# Altium PCB Motherboard.PcbDoc
Units mil, origin at the board's own origin, x right, y up, seen from the top; angles counter-clockwise.
Board outline 5022.5 x 5930 mil, 2 copper layers (Top Layer, Bottom Layer); 75 components, 54 nets, 323 pads, 10 vias.
Unrouted connection lines stored in the file: 58.
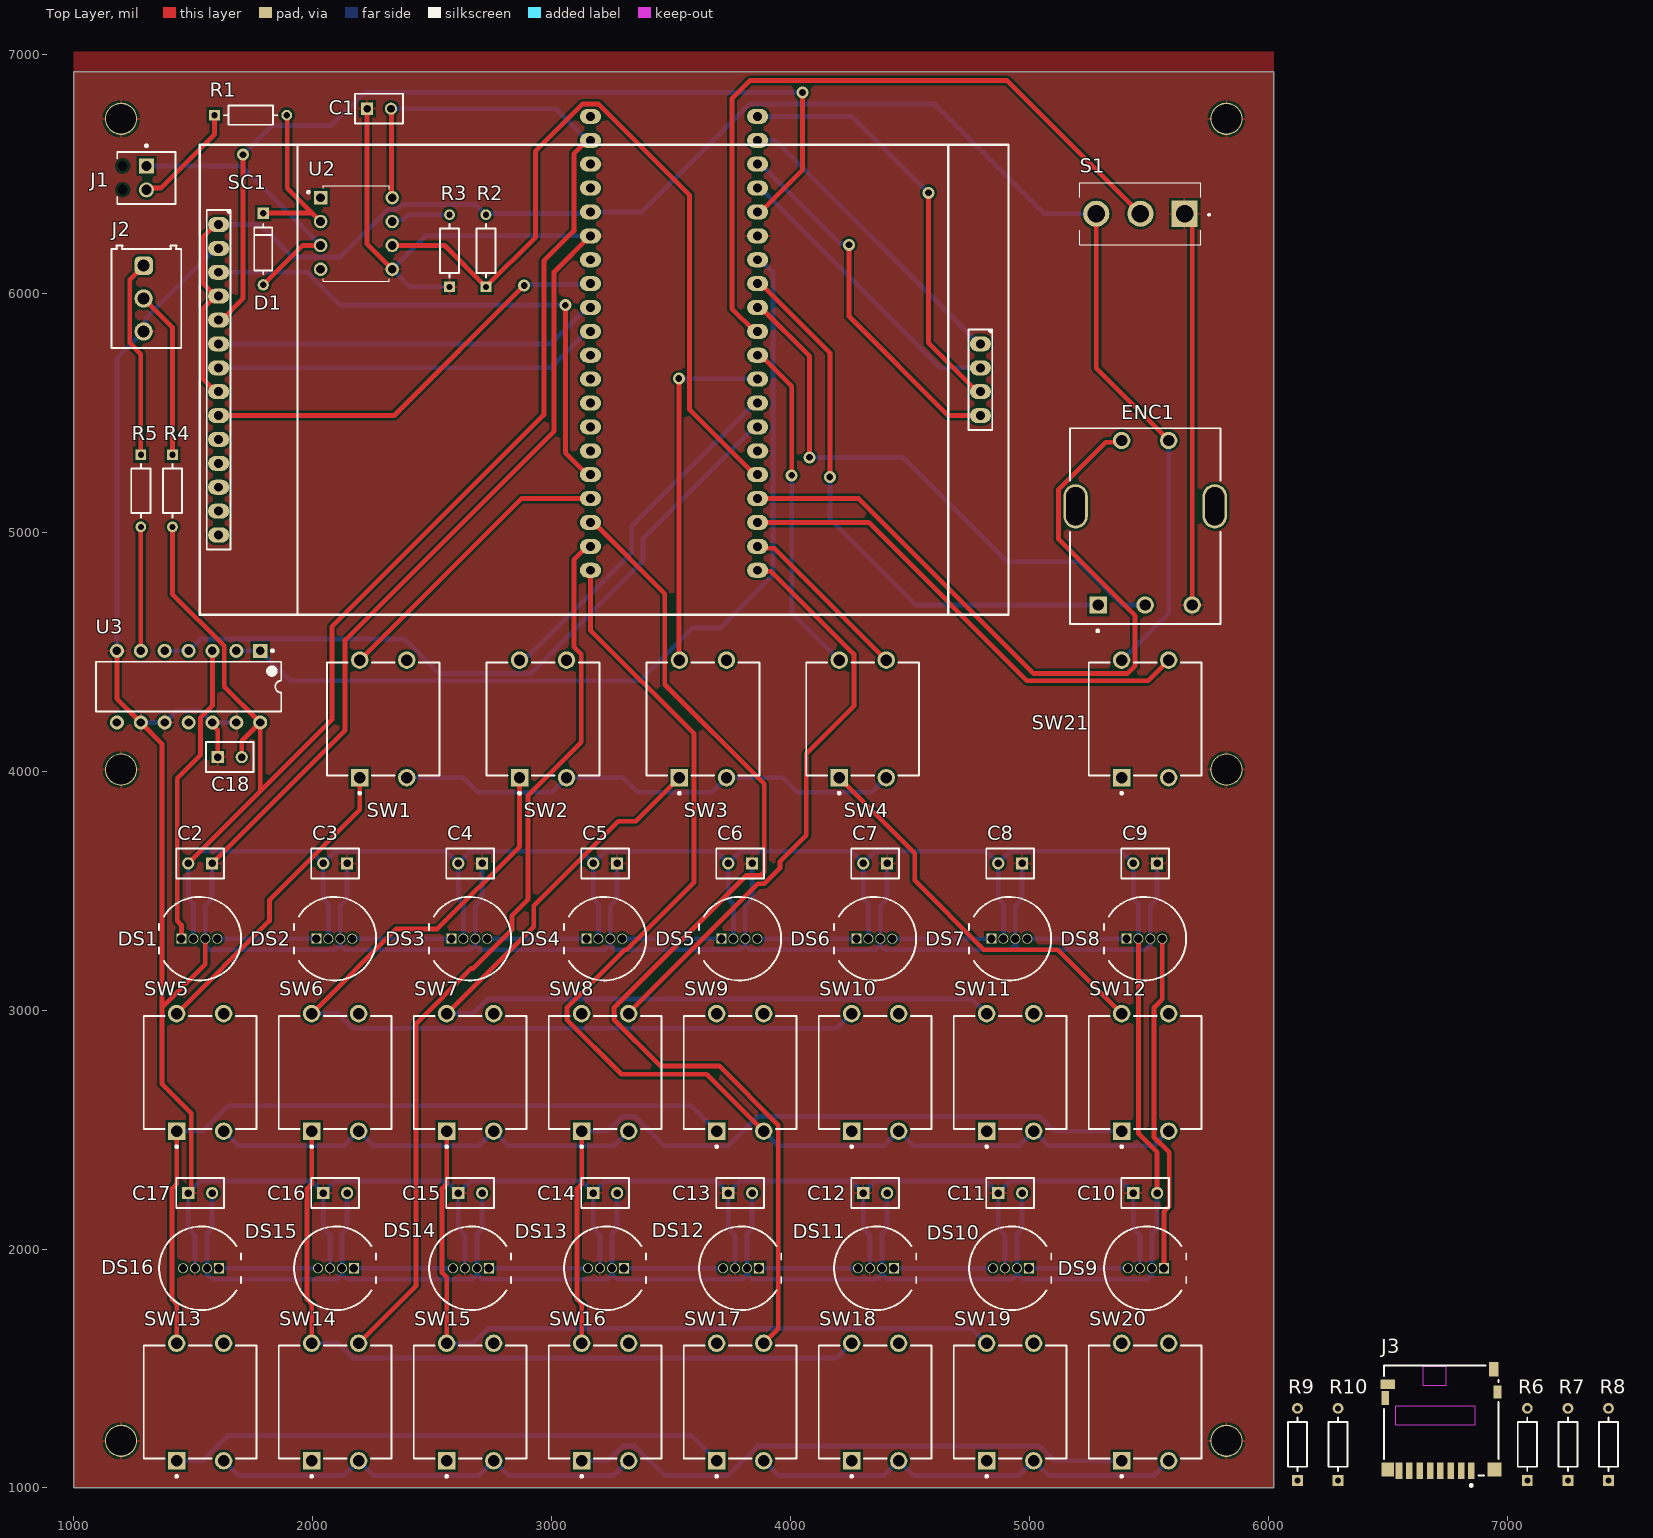
[diagram p0: Top Layer view]
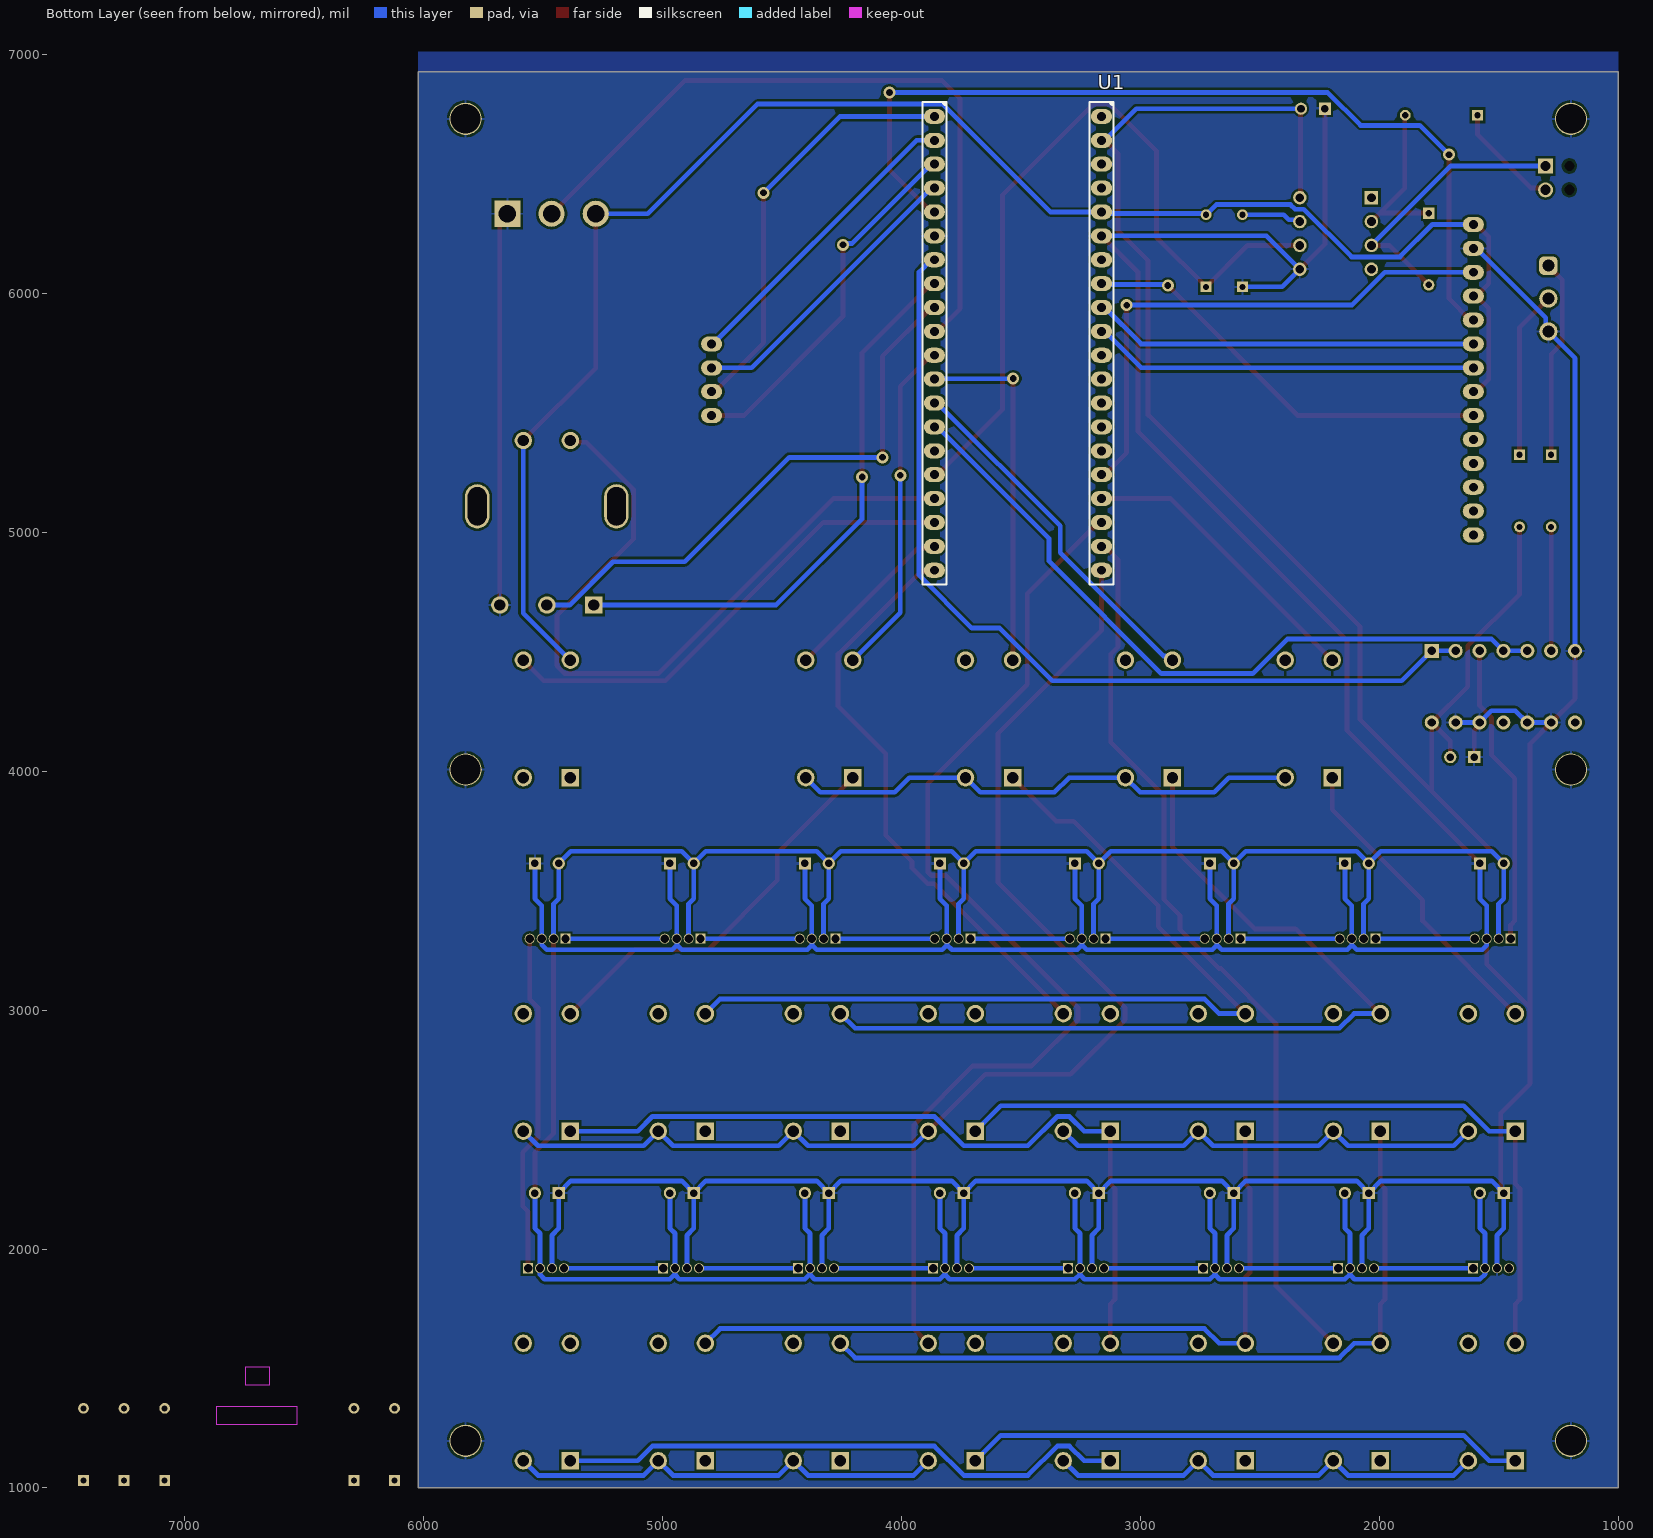
[diagram p1: Bottom Layer view, seen from below]

## Layer stack, top to bottom
Top Solder: solder mask 0.4, Solder Resist, Dk 3.5
Top Layer: signal copper 1.4
Dielectric 1: dielectric 12.6, FR-4, Dk 4.8
Bottom Layer: signal copper 1.4
Bottom Solder: solder mask 0.4, Solder Resist, Dk 3.5

## Board outline
1000,1000 6022.5,1000 6022.5,6930 1000,6930

## Design rules (kind name [scope] priority, off if disabled: settings)
Clearance [All] p1: gap=10 ignorepadtopadclearanceinfootprint=FALSE
PolygonConnect [All] p1: connectstyle=Relief reliefconductorwidth=10 reliefentries=4 polygonreliefangle="90 Angle" airgapwidth=10
RoutingVias [All] p1: holewidth=28 width=50 viastyle="Through Hole" minholewidth=28 minwidth=50 maxholewidth=28 maxwidth=50
SolderMaskExpansion [All] p1: expansion=4 istentingtop=FALSE
SupplyNets "Schematic Supply Nets_2" [InNet('+5')] p1: voltage=0.000
SupplyNets "Schematic Supply Nets_1" [InNet('GND')] p2: voltage=0.000
SupplyNets "Schematic Supply Nets" [InNet('+3V3RP')] p3: voltage=0.000
Width [All] p1: maxlimit=20 minlimit=20 preferedwidth=20 minimp=50.000000 maximp=50.000000 favimp=50.000000
30 further rules are at their usual default settings.

## Classes and differential pairs
component class PERIPHERALS: J3 R6 R7 R8 R9 R10 SC1
component class OUTPUT: C2 C3 C4 C5 C6 C7 C8 C9 C10 C11 C12 C13 C14 C15 C16 C17 C18 DS1 DS2 DS3 DS4 DS5 DS6 DS7 DS8 DS9 DS10 DS11 DS12 DS13 DS14 DS15 DS16 U3
component class INPUT: ENC1 S1 SW1 SW2 SW3 SW4 SW5 SW6 SW7 SW8 SW9 SW10 SW11 SW12 SW13 SW14 SW15 SW16 SW17 SW18 SW19 SW20 SW21
component class MIDI: C1 D1 J1 J2 R1 R2 R3 R4 R5 U2
component class MCU: U1

## Components (designator, comment, footprint, x,y, rotation, side; value= is the part's Value field where it differs from the comment)
C1 "0.1uF" CAPR51-254-508X318X736 2277.5,6775 r0 top
C2 "10uF" CAPR51-254-508X318X736 1528.43,3615 r180 top
C3 "10uF" CAPR51-254-508X318X736 2093.65,3615 r180 top
C4 "10uF" CAPR51-254-508X318X736 2658.88,3615 r180 top
C5 "10uF" CAPR51-254-508X318X736 3224.1,3615 r180 top
C6 "10uF" CAPR51-254-508X318X736 3789.32,3615 r180 top
C7 "10uF" CAPR51-254-508X318X736 4354.55,3615 r180 top
C8 "10uF" CAPR51-254-508X318X736 4919.77,3615 r180 top
C9 "10uF" CAPR51-254-508X318X736 5485,3615 r180 top
C10 "10uF" CAPR51-254-508X318X736 5485,2235 r0 top
C11 "10uF" CAPR51-254-508X318X736 4919.77,2235 r0 top
C12 "10uF" CAPR51-254-508X318X736 4354.55,2235 r0 top
C13 "10uF" CAPR51-254-508X318X736 3789.32,2235 r0 top
C14 "10uF" CAPR51-254-508X318X736 3224.1,2235 r0 top
C15 "10uF" CAPR51-254-508X318X736 2658.88,2235 r0 top
C16 "10uF" CAPR51-254-508X318X736 2093.65,2235 r0 top
C17 "10uF" CAPR51-254-508X318X736 1528.43,2235 r0 top
C18 "0.1uF" CAPR51-254-508X318X736 1652.5,4060 r0 top
D1 "1N4148" FP-017AG-MFG 1792.5,6187.5 r270 top
DS1 "8mmLED" 8mm 1525.04,3300 r90 top
DS2 "8mmLED" 8mm 2090.26,3300 r90 top
DS3 "8mmLED" 8mm 2655.49,3300 r90 top
DS4 "8mmLED" 8mm 3220.71,3300 r90 top
DS5 "8mmLED" 8mm 3785.94,3300 r90 top
DS6 "8mmLED" 8mm 4351.16,3300 r90 top
DS7 "8mmLED" 8mm 4916.39,3300 r90 top
DS8 "8mmLED" 8mm 5481.61,3300 r90 top
DS9 "8mmLED" 8mm 5488.39,1920 r270 top
DS10 "8mmLED" 8mm 4923.16,1920 r270 top
DS11 "8mmLED" 8mm 4357.94,1920 r270 top
DS12 "8mmLED" 8mm 3792.71,1920 r270 top
DS13 "8mmLED" 8mm 3227.49,1920 r270 top
DS14 "8mmLED" 8mm 2662.26,1920 r270 top
DS15 "8mmLED" 8mm 2097.04,1920 r270 top
DS16 "8mmLED" 8mm 1531.81,1920 r270 top
ENC1 "PEC16-4020F-S0024" FP-PEC16-4020F-S0024-MFG 5485,5027.5 r0 top
J1 "MIDI IN" PHOE-1725656-2 1303.62,6485 r270 top
J2 "MIDI OUT" 691214110003 1303.62,5980 r270 top
J3 "1140084168" FP-1140084168-0 6725,1282.5 r0 top
R1 "CMF5073K200FHEB" FP-CMF50-0 1740,6747.5 r0 top
R2 "CMF5073K200FHEB" FP-CMF50-0 2725,6180 r90 top
R3 "CMF5073K200FHEB" FP-CMF50-0 2572.5,6180 r90 top
R4 "CMF5073K200FHEB" FP-CMF50-0 1412.5,5175 r270 top
R5 "CMF5073K200FHEB" FP-CMF50-0 1280,5175 r270 top
R6 "CMF5073K200FHEB" FP-CMF50-0 7085,1182.5 r90 top
R7 "CMF5073K200FHEB" FP-CMF50-0 7255,1182.5 r90 top
R8 "CMF5073K200FHEB" FP-CMF50-0 7425,1182.5 r90 top
R9 "CMF5073K200FHEB" FP-CMF50-0 6122.5,1182.5 r90 top
R10 "CMF5073K200FHEB" FP-CMF50-0 6292.5,1182.5 r90 top
S1 "500SSP1S1M2REA" SW_500SSP1S1M2REA 5465.09,6335 r180 top
SC1 "ILI9341" ILI9341 1606,5390 r270 top locked
SW1 "MJTP1212A" FP-MJTP1212A-MFG 2295,4220 r90 top
SW2 "MJTP1212A" FP-MJTP1212A-MFG 2964.17,4220 r90 top
SW3 "MJTP1212A" FP-MJTP1212A-MFG 3633.33,4220 r90 top
SW4 "MJTP1212A" FP-MJTP1212A-MFG 4302.5,4220 r90 top
SW5 "MJTP1212A" FP-MJTP1212A-MFG 1528.43,2740 r90 top
SW6 "MJTP1212A" FP-MJTP1212A-MFG 2093.65,2740 r90 top
SW7 "MJTP1212A" FP-MJTP1212A-MFG 2658.88,2740 r90 top
SW8 "MJTP1212A" FP-MJTP1212A-MFG 3224.1,2740 r90 top
SW9 "MJTP1212A" FP-MJTP1212A-MFG 3789.32,2740 r90 top
SW10 "MJTP1212A" FP-MJTP1212A-MFG 4354.55,2740 r90 top
SW11 "MJTP1212A" FP-MJTP1212A-MFG 4919.77,2740 r90 top
SW12 "MJTP1212A" FP-MJTP1212A-MFG 5485,2740 r90 top
SW13 "MJTP1212A" FP-MJTP1212A-MFG 1528.43,1360 r90 top
SW14 "MJTP1212A" FP-MJTP1212A-MFG 2093.65,1360 r90 top
SW15 "MJTP1212A" FP-MJTP1212A-MFG 2658.88,1360 r90 top
SW16 "MJTP1212A" FP-MJTP1212A-MFG 3224.1,1360 r90 top
SW17 "MJTP1212A" FP-MJTP1212A-MFG 3789.32,1360 r90 top
SW18 "MJTP1212A" FP-MJTP1212A-MFG 4354.55,1360 r90 top
SW19 "MJTP1212A" FP-MJTP1212A-MFG 4919.77,1360 r90 top
SW20 "MJTP1212A" FP-MJTP1212A-MFG 5485,1360 r90 top
SW21 "MJTP1212A" FP-MJTP1212A-MFG 5485,4220 r90 top
U1 "RPI-PICO-ULTIMATE" "SAMTEC SSW-110-03-T-S" 3862.5,6292.5 r270 bottom
U2 "6N138" DIP762W50P254L1018H450Q8 2182.5,6252.5 r0 top
U3 "SN74HCT08N" N0014A 1480,4355 r270 top

## Footprints (in the part's own frame and the unit in brackets; to place one, negate y for a bottom-side part, rotate by r counter-clockwise, add the part's x,y. Pads: shape width x height; smd on the part's side, far side on the other; paste and mask are expansions set on the pad)
8mm [mm]
  rect 1.07x1.07 hole 0.889 paste-2539.97: 1(0,1.905)
  round 1.07 hole 0.889 paste-2539.97: 2(0,0.635) 3(0,-0.635) 4(0,-1.905)
  silkscreen extent -4.45,-4.45 4.45,4.28
691214110003 [mm] "3.50 mm Horizontal Entry Modular, 3p"
  rrect50% 1.95x1.95 hole 1.3: 1(-3.5,-0.3)
  round 1.95 hole 1.3: 2(0,-0.3) 3(3.5,-0.3)
  silkscreen extent -5.65,-3.7 5.25,3.7, body extent -5.7,-3.7 5.25,3.7, height 8.55
CAPR51-254-508X318X736 [mm] "THD, 2-Leads, Body 5.08x3.18mm"
  rect 1.3x1.3 hole 0.8: 1(-1.27,0)
  round 1.3 hole 0.8: 2(1.27,0)
  silkscreen extent -2.54,-1.59 2.54,1.59, body extent -2.54,-1.59 2.54,1.59, height 7.36
DIP762W50P254L1018H450Q8 [mm]
  rect 1.438x1.438 / inner round 1.438 / far side rect 1.438x1.438 hole 0.93: 1(-3.81,3.81)
  round 1.438 hole 0.93: 2(-3.81,1.27) 3(-3.81,-1.27) 4(-3.81,-3.81) 5(3.81,-3.81) 6(3.81,-1.27) 7(3.81,1.27) 8(3.81,3.81)
  silkscreen extent -5.24,-5.09 3.5,5.09, body extent -3.81,-4.88 3.81,4.88, height 4.96
FP-017AG-MFG [mm]
  rect 1.2x1.2 hole 0.7 paste-2539.97 mask+0: 1(-3.813,0)
  round 1.2 hole 0.7 paste-2539.97 mask+0: 2(3.813,0)
  silkscreen extent -2.68,-0.95 2.68,0.95, body extent -4.51,-1.05 4.51,1.05, height 0.25
FP-1140084168-0 [mm]
  rect 0.7x1.75 smd paste+0 mask+0: 1(3.2,-5.35) 2(2.1,-5.35) 3(1,-5.35) 4(-0.1,-5.35) 5(-1.2,-5.35) 6(-2.3,-5.35) 7(-3.4,-5.35) 8(-4.5,-5.35)
  rect 1x1.55 smd paste+0 mask+0: 9(5.575,5.45)
  rect 1.55x1 smd paste+0 mask+0: 10(-5.675,3.875)
  rect 0.8x1.4 smd paste+0 mask+0: 11(5.975,3.025)
  rect 0.8x1.5 smd paste+0 mask+0: 12(-5.975,2.375)
  rect 1.3x1.5 smd paste+0 mask+0: 13(-5.7,-5.225)
  rect 1.5x1.5 smd paste+0 mask+0: 14(5.65,-5.225)
  Keep-Out Layer region: -1.95,3.725 0.55,3.725 0.55,5.725 -1.95,5.725
  Keep-Out Layer region: -4.9,-0.475 3.6,-0.475 3.6,1.525 -4.9,1.525
  silkscreen extent -6.1,-7.02 6.1,5.85, body extent -6.55,-6.32 6.5,6.32, height 0.25
FP-CMF50-0 [mm]
  rect 1.15x1.15 hole 0.65 paste-2539.97 mask+0: 1(-3.835,0)
  round 1.15 hole 0.65 paste-2539.97 mask+0: 2(3.835,0)
  silkscreen extent -2.86,-1.01 2.86,1.01, body extent -4.51,-1.11 4.51,1.11, height 0.25
FP-MJTP1212A-MFG [mm]
  rect 1.85x1.85 hole 1.2 paste-2539.97 mask+0: 1(-6.25,2.5)
  round 1.85 hole 1.2 paste-2539.97 mask+0: 2(6.25,2.5) 3(-6.25,-2.5) 4(6.25,-2.5)
  silkscreen extent -8.02,-6 6,6, body extent -7.27,-6.1 7.27,6.1, height 0.25
FP-PEC16-4020F-S0024-MFG [mm]
  rrect100% 2.6x4.7 hole 4.1 slot 2 at 0 deg paste-2539.97 mask+0: 1(-7.4,2.1) 2(7.4,2.1)
  rect 1.85x1.85 hole 1.2 paste-2539.97 mask+0: A(-5,-8.4)
  round 1.85 hole 1.2 paste-2539.97 mask+0: B(0,-8.4) C(5,-8.4) D(-2.5,9.1) E(2.5,9.1)
  silkscreen extent -8,-11.27 8,10.4, body extent -8.8,-10.5 8.8,10.5, height 0.25
ILI9341 [mm]
  oval 1.6x2.25 hole 0.95: 1(-2.54,0) 2(-5.08,0) 3(-7.62,0) 4(-10.16,0) 5(-12.7,0) 6(-15.24,0) 7(-17.78,0) 8(-20.32,0) 9(-22.86,0) 10(-10.16,81.001) 11(-7.62,81.001) 12(-5.08,81.001) 13(-2.54,81.001) 14(10.16,0) 15(7.62,0) 16(5.08,0) 17(2.54,0) 18(0,0)
  silkscreen extent -31.34,-2.01 18.64,84, body extent -24.38,-1.21 11.68,82.21, height 8.51
N0014A [mm] "DIP, 14-Leads, Body 19.7x6.6mm, Pitch 2.54mm"
  rect 1.5x1.5 hole 0.9: 1(-3.81,7.62)
  round 1.5 hole 0.9: 2(-3.81,5.08) 3(-3.81,2.54) 4(-3.81,0) 5(-3.81,-2.54) 6(-3.81,-5.08) 7(-3.81,-7.62) 8(3.81,-7.62) 9(3.81,-5.08) 10(3.81,-2.54) 11(3.81,0) 12(3.81,2.54) 13(3.81,5.08) 14(3.81,7.62)
  silkscreen extent -3.93,-9.85 2.65,9.85, body extent -3.95,-9.85 3.95,9.85, height 5.08
PHOE-1725656-2 [mm] "Connector, 2-Leads, Body 6.2x5.4mm, Pitch 2.54mm"
  rect 1.6x1.6 hole 1.1: 1(-1.27,0)
  round 1.6 hole 1.1: 2(1.27,0)
  round 0 hole 1.1 unplated: MH1(-1.27,-2.54) MH2(1.27,-2.54)
  silkscreen extent -3.54,-3.1 2.77,3.1, body extent -2.77,-3.1 2.77,3.1, height 9
"SAMTEC SSW-110-03-T-S" [mm]
  oval 1.6x2.25 hole 0.95: 1(-11.43,0) 2(-8.89,0) 3(-6.35,0) 4(-3.81,0) 5(-1.27,0) 6(1.27,0) 7(3.81,0) 8(6.35,0) 9(8.89,0) 10(11.43,0) 11(13.97,0) 12(16.51,0) 13(19.05,0) 14(21.59,0) 15(24.13,0) 16(26.67,0) 17(29.21,0) 18(31.75,0) 19(34.29,0) 20(36.83,0) 21(36.83,17.78) 22(34.29,17.78) 23(31.75,17.78) 24(29.21,17.78) 25(26.67,17.78) 26(24.13,17.78) 27(21.59,17.78) 28(19.05,17.78) 29(16.51,17.78) 30(13.97,17.78) 31(11.43,17.78) 32(8.89,17.78) 33(6.35,17.78) 34(3.81,17.78) 35(1.27,17.78) 36(-1.27,17.78) 37(-3.81,17.78) 38(-6.35,17.78) 39(-8.89,17.78) 40(-11.43,17.78)
  silkscreen extent -12.96,-1.27 38.36,19.05, body extent -12.95,-1.21 38.35,18.99, height 8.51
SW_500SSP1S1M2REA [mm]
  rect 2.775x2.775 / inner round 2.775 / far side rect 2.775x2.775 hole 1.85: 1(-4.7,0)
  round 2.775 hole 1.85: 2(0,0) 3(4.7,0)
  silkscreen extent -7.4,-3.3 6.43,3.3, body extent -6.35,-3.3 6.35,3.3, height 12.93

## Part data
C1 C2 C3 C4 C5 C6 C7 C8 C9 C10 C11 C12 C13 C14 C15 C16 C17 C18: library part CMP-1664-00004-1, "Radial Leaded Multilayer Ceramic Capacitor, 0.1 uF, +/- 10%, 50 V, -55 to 125 degC, 2-Pin THD, RoHS, Tape and Reel", Case\Package=SOT-23-5, Dropout Voltage="260 mV", Max Input Voltage="8 V", Max Operating Temperature="85 degC", Max Power Dissipation="250 mW", Min Operating Temperature="-40 degC", Output Current="150 mA", Output Voltage="5 V", Package Quantity=3000, ComponentLink1Description="Manufacturer URL", ComponentLink1URL=http://www.kemet.com/, ComponentLink2Description=Datasheet, ComponentLink2URL=http://www.kemet.com/docfinder?Partnumber=C320C104K5R5TA, DatasheetVersion=Dec-15, Height="1.3 mm", Length="3 mm", Mount="Surface Mount", Outputs=1, PackageDescription="2-Pin Through Hole Device, Body 5.08 x 3.18 mm, Pitch 2.54 mm", PackageReference=CAPR51-254-508X318X736, Packaging="Tape and Reel", Pins=5, Radiation Hardening=No, RoHSCompliant=true, Width="1.8 mm"
D1: library part CMP-07163-000046-1, "DIODE GEN PURP 100V 200MA DO35", Average Rectified Current=200mA, Capacitance=4pF, Case/Package=DO-35, Current=4A, Forward Current=300mA, Forward Voltage=1V, Max Forward Surge Current (Ifsm)=1A, Max Operating Temperature=175°C, Max Power Dissipation=500mW, Max Repetitive Reverse Voltage (Vrrm)=100V, Max Reverse Current=5uA, Min Operating Temperature=-65°C, Package Quantity=2000, Contact Plating=Tin, Current Rating=200mA, Diameter=1.91mm, Element Configuration=Single, Height=4.56mm, Lead Free="Lead Free", Length=4.56mm, Max Reverse Voltage (DC)=100V, Max Surge Current=4A, Mount="Through Hole", Number of Pins=2, Output Current=200mA, Outside Diameter=1.85mm, Packaging=Bulk, Peak Non-Repetitive Surge Current=4A, Polarity=Standard, Power Dissipation=500mW, Radiation Hardening=No, REACH SVHC="No SVHC", Recovery Time=4ns, Reverse Recovery Time=4ns, Reverse Voltage=100V, Series=-, Voltage=100V, Voltage Rating (DC)=100V, Weight=0.01lb, Width=1.91mm
DS1 DS2 DS3 DS4 DS5 DS6 DS7 DS8 DS9 DS10 DS11 DS12 DS13 DS14 DS15 DS16: "WS2812"
ENC1: library part CMP-07421-000008-1, "ROTARY ENCODER MECHANICAL 24PPR", Max Operating Temperature=70°C, Min Operating Temperature=-30°C, Package Quantity=50, Built in Switch=Yes, Contact Plating=Tin, Detent=No, Encoder Type=Mechanical, Length=28mm, Mount="Through Hole", Number of Channels=2, Orientation=Vertical, Output Type=Quadrature, Packaging=Bulk, Pulses per Revolution=24, RoHS Compliant=Yes, Series=PEC16, Termination="PC Pin", Type=Mechanical
J1: library part CMP-2000-05299-1, "Male Header, Pitch 2.54 mm, 1 x 2 Position, Height 9 mm, Tail Length 3.5 mm", Colour=Green, Manufacturer="Phoenix Contact", Manufacturer part No.=1725656, Content=250pc(s), Datasheet URL=http://datasheet.octopart.com/1725656-Phoenix-Contact-datasheet-5302866.pdf, Datasheet Version=Apr-08, Industrial packaging=Yes, Manufacturer URL=http://www.phoenixcontact.com/, Number of Contacts=2, Pitch=2.54mm, Type=MPT0,5/2-2,54
J2: library part CMP-1502-02466-2, Color="Blue, Green", Current=10A, Max Operating Temperature=105°C, Min Operating Temperature=-40°C, Voltage=300V, Contact Material=Brass, Contact Plating="Brass, Tin", Current Rating=10A, Height=12.2mm, Housing Material=Nylon, Lead Pitch=3.5mm, Length=7.4mm, Mount="Through Hole", NexarPartId=18818289, Number of Contacts=3, Number of Levels=1, Number of Pins=3, Number of Positions Per Level=3, Packaging=Box, Pitch=3.5052mm, Plating="Brass, Steel", REACH SVHC=Unknown, RoHS=Compliant, Stripping Length=-6mm, Termination=Screw, Voltage Rating=300V, Width=10.9mm, Wire Gauge (Max)=24AWG, Wire Gauge (Min)=16AWG, Wire/Cable Gauge=24AWG
J3: library part CMP-02360-000003-1, "CONN MICRO SD CARD PUSH-PULL R/A", Flammability Rating="UL94 V-0", Package Quantity=7500, Connector Type=Connector, Contact Material="Copper Alloy", Contact Plating=Gold, Depth=11.45mm, Gender=Receptacle, Height=1.55mm, Housing Material=Polymer, Lead Free="Lead Free", Length=15.6mm, Mount="Surface Mount", Number of Contacts=8, Number of Rows=1, Orientation="Right Angle", Packaging="Tape and Reel", Pitch=1.1mm, Radiation Hardening=No, Termination=SMD/SMT
R1 R4 R5: library part CMP-00030-44386654-1, "CMF5073K200FHEB Res Metal Film 73.2K Ohm 1% 0.125W(1/8W) ±50ppm/°C Epoxy AXL T/R", Case/Package=Axial, Max Operating Temperature=175°C, Max Power Dissipation=250mW, Min Operating Temperature=-55°C, Power Rating=125mW, Resistance=220Ω, Temperature Coefficient=50ppm/°C, Tolerance=1%, Voltage Rating=200V, Composition="Metal Film", Diameter=1.65mm, Features="Flame Retardant Coating, Moisture Resistant", Lead Free="Lead Free", Length=3.81mm, Mount="Through Hole", NexarPartId=44386654, Number of Terminations=2, Packaging="Cut Tape", RoHS=Compliant, Schedule B="8533210090, 8533210090", Termination=Axial, Voltage Rating (DC)=200V, Width=1.65mm
R2: library part CMP-00030-44386654-1, "CMF5073K200FHEB Res Metal Film 73.2K Ohm 1% 0.125W(1/8W) ±50ppm/°C Epoxy AXL T/R", Case/Package=Axial, Max Operating Temperature=175°C, Max Power Dissipation=250mW, Min Operating Temperature=-55°C, Power Rating=125mW, Resistance=1kΩ, Temperature Coefficient=50ppm/°C, Tolerance=1%, Voltage Rating=200V, Composition="Metal Film", Diameter=1.65mm, Features="Flame Retardant Coating, Moisture Resistant", Lead Free="Lead Free", Length=3.81mm, Mount="Through Hole", NexarPartId=44386654, Number of Terminations=2, Packaging="Cut Tape", RoHS=Compliant, Schedule B="8533210090, 8533210090", Termination=Axial, Voltage Rating (DC)=200V, Width=1.65mm
R3 R6 R7 R8 R9 R10: library part CMP-00030-44386654-1, "CMF5073K200FHEB Res Metal Film 73.2K Ohm 1% 0.125W(1/8W) ±50ppm/°C Epoxy AXL T/R", Case/Package=Axial, Max Operating Temperature=175°C, Max Power Dissipation=250mW, Min Operating Temperature=-55°C, Power Rating=125mW, Resistance=10kΩ, Temperature Coefficient=50ppm/°C, Tolerance=1%, Voltage Rating=200V, Composition="Metal Film", Diameter=1.65mm, Features="Flame Retardant Coating, Moisture Resistant", Lead Free="Lead Free", Length=3.81mm, Mount="Through Hole", NexarPartId=44386654, Number of Terminations=2, Packaging="Cut Tape", RoHS=Compliant, Schedule B="8533210090, 8533210090", Termination=Axial, Voltage Rating (DC)=200V, Width=1.65mm
S1: "Slide Switch SPDT Through Hole  <a href=\"https://pricing.snapeda.com/parts/500SSP1S1M2REA/E-Switch/view-part?ref=eda\">Check availability</a> <a href=\"https://pricing.snapeda.com/parts/500SSP1S1M2REA/E-Switch/view-part?ref=eda\">Check availability</a>", Package=None, Availability=Unavailable, MP=500SSP1S1M2REA, Price=None
SW1 SW2 SW3 SW4 SW5 SW6 SW7 SW8 SW9 SW10 SW11 SW12 SW13 SW14 SW15 SW16 SW17 SW18 SW19 SW20 SW21: library part CMP-47024-000003-1, "SWITCH TACTILE SPST-NO 0.05A 12V", Contact Resistance=100mR, Current Rating=50mA, Max Operating Temperature=70°C, Max Voltage Rating (DC)=12V, Min Operating Temperature=-20°C, Operating Force=160gf, Package Quantity=100, Actuator Length=3.5mm, Actuator Material=Polyoxymethylene, Actuator Type=Standard, Contact Material=Bronze, Contact Plating=Silver, Electrical Life=100000Cycles, Illumination Type=Non-Illuminated, Mechanical Life=100000Cycles, Mount="Through Hole", Orientation=Straight, Packaging=Bulk, REACH SVHC="No SVHC", Switch Function=Off-Mom, Switch Travel=0.3mm, Termination="PC Pin", Throw Configuration=SPST, Voltage Rating (DC)=12V
U1: library part RPI-PICO-MOD_SM, "RASPBERRY PI PICO RP2040 BOARD NO TEST PADS", Manufacturer="Raspberry Pi Foundation", Manufacturer Part No=SC0915, Supplier Part No=2648-SC0915CT-ND, Mounting Technology=SMT, Supplier=DigiKey, Supplier Link=https://www.digikey.com/en/products/detail/raspberry-pi/SC0915/13684020
U2: "ATT.NUM.P_TOT: 100 mW; Enclosure type (semiconductors): DIP 8; Forward current I(F): 20 mA; Forward voltage U(F): 1.1 V; Forward voltage U(F) typ.: 1.1 V; Insulation voltage: 5000 V RMS; Manufacturer: Lite-On; Manufacturer code (components): LTO; Mounting", Package="DIP-8 Lite-On", Check_prices=https://www.snapeda.com/parts/6N138/Isocom/view-part/?ref=eda, MF="Isocom Components", MP=6N138, SnapEDA_Link=https://www.snapeda.com/parts/6N138/Isocom/view-part/?ref=snap
U3: library part CMP-0777-00257-3, "Quadruple 2-Input Positive-AND Gates, N0014A, TUBE", F @ Nom Voltage(Max)(Mhz)=25, Generic Part Number=SN74HCT08, ICC @ Nom Voltage(Max)(mA)=0.02, Manufacturer="Texas Instruments", Operating Temperature Range(C)="-40 to 85", Rating=Catalog, tpd @ Nom Voltage(Max)(ns)=27, Voltage(Nom)(V)=5, Bits(#)=4, DatasheetVersion=SCLS063D, Input Type=TTL, Output Drive (IOL/IOH)(Max)(mA)=-5.2/5.2, Output Type=CMOS, PackageReference=N0014A, Schmitt Trigger=Yes, Technology Family=HCT, VCC(Max)(V)=5.5, VCC(Min)(V)=4.5

## Free pads (board coordinates)
  round 135 hole 125: 2(1197.5,1197.5) 2(1197.5,4007.5) 2(1197.5,6732.5) 2(5825,1197.5) 2(5825,4007.5) 2(5825,6732.5)

## Via types
v1: diameter 50, hole 28, Top Layer to Bottom Layer, 10 vias

## Nets (pads, with @x,y where several pads share a name; then routed paths per layer and width w, separated by ;. In a path a pad name is that pad's centre, name@x,y a point inside that pad or via, vN(x,y) a via of type N, cw(c..) or ccw(c..) an arc to the next point about the centre after c; other vN are vias at no path point)
+3V3RP: ENC1.E J3.4 R2.2 R6.2 R7.2 R8.2 R9.2 R10.2 S1.3 SC1.2 SC1.6 SC1.9 SW21.1 SW21.2 U1.36 | length 7120.6
  Top Layer w20: SC1.2 1593.2,5590 1541.71,5641.5 1541.71,5938.5 SC1.6@1593.2,5990 ; SC1.6 SC1.6@1593.2,5990 ; SC1.9 1593.2,6290 1541.71,6238.5 1541.71,6041.5 SC1.6@1593.2,5990 ; S1.3 5280.05,5689.14 ENC1.E
  Bottom Layer w20: SC1.9 1777.68,6290 1913.49,6154.19 2115.88,6154.19 2315.88,6354.19 2352.51,6354.19 2371.94,6373.62 2682.36,6373.62 R2.2 2729.84,6335.82 3155.82,6335.82 U1.36 3376.88,6342.5 3828.37,6794 4603.13,6794 5062.12,6335 S1.3 ; SW21.2 5583.42,4662.91 ENC1.E
+5: C1.2 C2.2 C3.2 C4.2 C5.2 C6.2 C7.2 C8.2 C9.2 C10.2 C11.2 C12.2 C13.2 C14.2 C15.2 C16.2 C17.2 C18.2 DS1.2 DS2.2 DS3.2 DS4.2 DS5.2 DS6.2 DS7.2 DS8.2 DS9.2 DS10.2 DS11.2 DS12.2 DS13.2 DS14.2 DS15.2 DS16.2 R4.2 U1.39 U2.8 U3.14 | length 21373.2
  Top Layer w20: R4.2 1412.5,4742.54 1629.53,4525.52 1629.53,4355.47 U3.14 ; C2.2 1780,3916.57 ; C18.2 1702.5,4127.5 U3.14 ; C1.2@2325.29,6777.21 2330,6772.5 2330,6405 U2.8 ; U1.39 3149.7,6642.5 3093.21,6586 3093.21,6263.21 2967.5,6137.5 2967.5,5492.5 2080,4605 2080,4216.57 1780,3916.57 ; DS8.2 5456.61,2484.39 5535,2406.01 C10.2 ; 1780,3916.57 U3.14
  Bottom Layer w20: DS1.2 1500.04,3445.47 1478.43,3467.08 C2.2 1529.02,3665.59 1993.06,3665.59 C3.2 ; DS16.2 1556.81,2065.47 1578.43,2087.08 C17.2 ; DS16.2@1557.04,1919.78 1557.04,1895.46 1578.1,1874.4 2103.47,1874.4 2122.04,1892.96 2122.04,2065.47 2143.65,2087.08 C16.2 ; DS2.2 2065.26,3445.47 2043.65,3467.08 C3.2 ; DS15.2@2122.26,1919.78 2122.26,1895.46 2143.32,1874.4 2668.7,1874.4 2687.26,1892.96 2687.26,2065.47 2708.88,2087.08 C15.2 ; C1.2 3017.2,6775 3149.7,6642.5 U1.39 ; DS3.2 2630.49,3445.47 2608.88,3467.08 C4.2 ; DS14.2@2687.49,1919.78 2687.49,1895.46 2708.55,1874.4 3233.92,1874.4 3252.49,1892.96 3252.49,2065.47 3274.1,2087.08 C14.2 ; DS4.2 3195.71,3445.47 3174.1,3467.08 C5.2 ; DS13.2@3252.71,1919.78 3252.71,1895.46 3273.77,1874.4 3799.15,1874.4 3817.71,1892.96 DS12.2 3817.71,2065.47 3839.32,2087.08 C13.2 ; DS5.2 3760.94,3445.47 3739.32,3467.08 C6.2 ; DS12.2@3817.94,1919.78 3817.94,1895.46 3839,1874.4 4364.37,1874.4 4382.94,1892.96 DS11.2 4382.94,2065.47 4404.55,2087.08 C12.2 ; DS6.2 4326.16,3445.47 4304.55,3467.08 C7.2 ; DS11.2@4383.39,1919.55 4383.39,1895.24 4404.45,1874.18 4929.82,1874.18 4948.39,1892.74 4948.39,1895.46 ; DS7.2 4891.39,3445.47 4869.77,3467.08 C8.2 ; DS10.2 4948.16,2065.47 4969.77,2087.08 C11.2 ; DS10.2@4948.39,1919.78 4948.39,1895.46 ; DS8.2 5456.61,3445.47 5435,3467.08 C9.2 5384.41,3665.59 4920.37,3665.59 C8.2 ; 5495.29,1873.94 5494.82,1874.4 ; C10.2 5535,2087.08 5513.39,2065.47 5513.39,1892.96 5494.82,1874.4 ; C3.2 2094.24,3665.59 2558.28,3665.59 C4.2 ; C4.2 2659.47,3665.59 3123.51,3665.59 C5.2 ; C5.2 3224.69,3665.59 3688.73,3665.59 C6.2 ; C6.2 3789.92,3665.59 4253.96,3665.59 C7.2 ; C7.2 4355.14,3665.59 4819.18,3665.59 C8.2 ; 4948.39,1895.46 4969.45,1874.4 5494.82,1874.4
C1: SW1.1 SW1.2 SW5.1 SW5.2 SW9.1 SW9.2 SW13.1 SW13.2 SW17.1 SW17.2 U1.24 | length 8152.9
  Top Layer w20: SW13.2 1430,1770.09 1410.75,1789.35 1410.75,2253.86 1430,2273.11 SW5.1 ; SW5.2 1818.34,3374.41 1818.34,3461.24 2196.57,3839.47 SW1.1 ; SW1.2 2873.01,5142.5 U1.24
  Bottom Layer w20: SW13.1 1539.99,1113.94 1646.06,1220 3584.84,1220 SW17.1 ; SW5.1 1539.99,2493.94 1646.06,2600 3584.84,2600 SW9.1
C2: SW2.1 SW2.2 SW6.1 SW6.2 SW10.1 SW10.2 SW14.1 SW14.2 SW18.1 SW18.2 U1.13 | length 8484.9
  Top Layer w20: SW14.2 1995.22,1770.09 1975.97,1789.35 1975.97,2253.86 1995.22,2273.11 SW6.1 ; SW6.2 2349.91,3340.75 2521.16,3340.75 2865.74,3685.33 SW2.1
  Bottom Layer w20: SW14.2 2105.22,1606.06 2166.64,1544.65 4194.71,1544.65 SW18.2 ; SW6.2 2105.22,2986.06 2166.64,2924.65 4194.71,2924.65 SW10.2 ; SW2.2 2880.04,4466.06 2896.84,4482.87 2902.87,4482.87 3335.29,4915.29 3335.29,5028.09 3849.7,5542.5 U1.13
C3: SW3.1 SW3.2 SW7.1 SW7.2 SW11.1 SW11.2 SW15.1 SW15.2 SW19.1 SW19.2 U1.12 | length 8472.9
  Top Layer w20: SW15.2 2560.45,1881.67 2541.2,1900.92 2541.2,2253.86 2560.45,2273.11 SW7.1 ; SW7.2 2924.93,3350.54 2924.93,3437.37 3279.29,3791.74 3352.71,3791.74 SW3.1 ; v1(3532.5,5645) 3533.7,5643.8 3533.7,4467.27 SW3.2
  Bottom Layer w20: SW15.2 2670.44,1606.06 2731.86,1667.48 4759.93,1667.48 SW19.2 ; SW7.2 2670.44,2986.06 2731.86,3047.48 4759.93,3047.48 SW11.2 ; v1(3532.5,5645) 3533.75,5643.75 3861.25,5643.75 U1.12
C4: SW4.1 SW4.2 SW8.1 SW8.2 SW12.1 SW12.2 SW16.1 SW16.2 SW20.1 SW20.2 U1.11 | length 8814.8
  Top Layer w20: SW16.2 3125.67,1770.09 3106.42,1789.35 3106.42,2253.86 3125.67,2273.11 SW8.1 ; U1.11 3875.3,5742.5 4005,5612.8 v1(4005,5240) ; SW4.1 4520.23,3657.78 4520.23,3543.68 4809.97,3253.94 5118.7,3253.94 SW12.2
  Bottom Layer w20: SW16.1 3235.67,1113.94 3297.09,1175.35 3347.96,1175.35 3470.8,1052.52 3739.48,1052.52 3862.31,1175.35 5043.64,1175.35 5105.06,1113.94 SW20.1 ; SW8.1 3235.67,2493.94 3297.09,2555.35 3347.96,2555.35 3470.8,2432.52 3739.48,2432.52 3862.31,2555.35 5043.64,2555.35 5105.06,2493.94 SW12.1 ; v1(4005,5240) 4005,4665.14 SW4.2
D/C: SC1.5 U1.5 | length 3777.4
  Top Layer w20: SC1.5 1618.8,5890 1707.5,5978.7 v1(1707.5,6582.5) ; U1.5 3875.3,6342.5 4050,6517.2 v1(4050,6842.5)
  Bottom Layer w20: v1(1707.5,6582.5) 1829.86,6704.86 2077.9,6704.86 2215.53,6842.5 v1(4050,6842.5)
EX_SW: SW21.3 SW21.4 U1.18 | length 2031.3
  Top Layer w20: U1.18 4327.34,5042.5 4990.19,4379.65 5497.01,4379.65 SW21.4
GND: C1.1 C2.1 C3.1 C4.1 C5.1 C6.1 C7.1 C8.1 C9.1 C10.1 C11.1 C12.1 C13.1 C14.1 C15.1 C16.1 C17.1 C18.1 DS1.3 DS2.3 DS3.3 DS4.3 DS5.3 DS6.3 DS7.3 DS8.3 DS9.3 DS10.3 DS11.3 DS12.3 DS13.3 DS14.3 DS15.3 DS16.3 ENC1.C J2.3 J3.6 pad.2 R3.1 S1.1 SC1.8 U1.6 U1.15 U1.35 U1.38 U2.5 U3.7 U3.9 U3.10 U3.12 U3.13 | length 25962.9
  Top Layer w20: U3.7 1180,4305 U3.9 1368.58,4116.42 1368.58,3011.5 ; C17.1 1491.42,2247.99 1491.42,2569.63 1368.58,2692.46 1368.58,3011.5 ; DS1.3 1550.04,3192.96 1368.58,3011.5 ; C2.1 2135.16,4171.73 2135.16,4550.16 3010,5425 3010,6091.16 3161.34,6242.5 U1.35 ; U3.12 1580,4194.43 1602.5,4171.93 C18.1 ; C1.1 2227.5,6207.5 U2.5 ; S1.1 5681.85,6303.28 ENC1.C
  Bottom Layer w20: U3.7 1180,5730.39 J2.3 1302.67,5853.07 1302.67,5899.47 1593.2,6190 SC1.8 ; U3.9 U3.10 1429.53,4254.53 1530.47,4254.53 U3.12 U3.13 ; DS16.3@1511.04,1915.77 DS16.3 1506.81,2058.51 1478.43,2086.89 C17.1 1529.02,2285.59 1993.06,2285.59 C16.1 ; 1549.58,3272.5 1568.14,3253.94 2093.51,3253.94 2114.58,3275 DS2.3@2114.58,3299.31 ; 1550.04,3272.5 DS1.3 1550.04,3438.51 1578.43,3466.89 C2.1 ; DS15.3@2067.8,1915.77 DS15.3 ; DS15.3@2072.5,1919.54 DS15.3 ; DS2.3@2114.8,3299.54 2114.8,3272.5 2133.36,3253.94 2658.74,3253.94 2679.8,3275 DS3.3@2679.8,3299.31 ; DS2.3 2115.26,3438.51 2143.65,3466.89 C3.1 ; R3.1 2405.98,6029.02 U2.5 2472.5,6242.5 U1.35 ; DS14.3 2637.26,2058.51 2608.88,2086.89 C15.1 ; DS3.3@2680.03,3299.54 2680.03,3272.5 2698.59,3253.94 3223.96,3253.94 3244.79,3274.76 ; DS3.3 2680.49,3438.51 2708.88,3466.89 C4.1 ; DS13.3 3202.49,2058.51 3174.1,2086.89 C14.1 ; DS4.3@3244.79,3299.07 3244.79,3274.76 ; DS4.3@3245.03,3299.31 3245.03,3275 3244.79,3274.76 ; DS4.3 3245.71,3438.51 3274.1,3466.89 C5.1 ; DS12.3 3767.71,2058.51 3739.32,2086.89 C13.1 ; DS5.3@3809.79,3298.85 3809.79,3274.54 3788.72,3253.47 3263.35,3253.47 3244.79,3272.04 3244.79,3274.76 ; DS5.3@3810.47,3299.54 3810.47,3272.5 3829.04,3253.94 4354.41,3253.94 4375.24,3274.76 ; DS5.3 3810.94,3438.51 3839.32,3466.89 C6.1 ; DS11.3 4332.94,2058.51 4304.55,2086.89 C12.1 ; DS6.3@4375.24,3299.07 4375.24,3274.76 ; DS6.3@4375.47,3299.31 4375.47,3275 4375.24,3274.76 ; DS6.3 4376.16,3438.51 4404.55,3466.89 C7.1 ; DS10.3 4898.16,2058.51 4869.77,2086.89 C11.1 ; DS7.3@4940.24,3298.85 4940.24,3274.54 4919.17,3253.47 4393.8,3253.47 4375.24,3272.04 4375.24,3274.76 ; DS7.3@4940.92,3299.54 4940.92,3272.5 4959.49,3253.94 5484.86,3253.94 5505.92,3275 DS8.3@5505.92,3299.31 ; DS7.3 4941.39,3438.51 4969.77,3466.89 C8.1 ; DS9.3 5463.39,2058.51 5435,2086.89 C10.1 5384.41,2285.59 4920.37,2285.59 C11.1 ; DS8.3 5506.61,3438.51 5535,3466.89 C9.1 ; C16.1 2094.24,2285.59 2558.28,2285.59 C15.1 ; C16.1 2043.65,2086.89 2072.04,2058.51 DS15.3 ; C15.1 2659.47,2285.59 3123.51,2285.59 C14.1 ; C14.1 3224.69,2285.59 3688.73,2285.59 C13.1 ; C13.1 3789.92,2285.59 4253.96,2285.59 C12.1 ; C12.1 4355.14,2285.59 4819.18,2285.59 C11.1
INPUT.R1: SW1.3 SW1.4 SW2.3 SW2.4 SW3.3 SW3.4 SW4.3 SW4.4 U1.19 | length 2895.9
  Top Layer w20: U1.19 3870.73,4934.27 3932.71,4934.27 SW4.4
  Bottom Layer w20: SW1.3 2629.41,3973.94 2690.83,3912.52 3001.17,3912.52 SW2.3 3298.58,3973.94 3359.99,3912.52 3670.34,3912.52 SW3.3 3967.74,3973.94 4029.16,3912.52 4339.51,3912.52 SW4.3
INPUT.R2: SW5.3 SW5.4 SW6.3 SW6.4 SW7.3 SW7.4 SW8.3 SW8.4 U1.20 | length 4308.5
  Top Layer w20: SW8.4 3322.53,2989.07 3862.87,3529.41 3889.77,3529.41 3955.73,3595.37 3955.73,3622.27 4066.51,3733.05 4066.51,4075 4265.49,4273.98 4265.49,4491.5 3918.38,4838.62 3866.38,4838.62 U1.20
  Bottom Layer w20: SW5.3 1688.27,2432.52 2130.66,2432.52 SW6.3 2253.49,2432.52 2695.88,2432.52 SW7.3 2818.72,2432.52 3261.11,2432.52 SW8.3
INPUT.R3: SW9.3 SW9.4 SW10.3 SW10.4 SW11.3 SW11.4 SW12.3 SW12.4 U1.21 | length 5151.8
  Top Layer w20: U1.21 3162.5,4591.81 3596.33,4157.99 3596.33,3535.47 3314.79,3253.94 3306.69,3253.94 3064.26,3011.5 3064.26,2960.62 3292.55,2732.33 3649.35,2732.33 SW9.3
  Bottom Layer w20: SW9.3 3949.17,2432.52 4391.56,2432.52 SW10.3 4514.39,2432.52 4956.78,2432.52 SW11.3 5079.62,2432.52 5522.01,2432.52 SW12.3
INPUT.R4: SW13.3 SW13.4 SW14.3 SW14.4 SW15.3 SW15.4 SW16.3 SW16.4 U1.22 | length 5624.5
  Top Layer w20: SW14.4 2432.22,1846.2 2432.22,2944.69 2662.25,3174.72 2670.35,3174.72 2833.56,3337.93 2833.56,3395.5 2900.74,3462.68 2900.74,3898.94 3124.01,4122.21 3124.01,4491.5 3093.21,4522.3 3093.21,4886 3149.7,4942.5 U1.22
  Bottom Layer w20: SW13.3 1688.27,1052.52 2130.66,1052.52 SW14.3 2253.49,1052.52 2695.88,1052.52 SW15.3 2818.72,1052.52 3261.11,1052.52 SW16.3
INPUT.R5: SW17.3 SW17.4 SW18.3 SW18.4 SW19.3 SW19.4 SW20.3 SW20.4 U1.23 | length 6344.9
  Top Layer w20: U1.23 3175.3,5042.5 3473.49,4744.3 3473.49,4364.07 3889.92,3947.65 3889.92,3579.05 3875.27,3564.41 3814.01,3564.41 3261.11,3011.5 3261.11,2960.62 3454.4,2767.33 3701.21,2767.33 3949.17,2519.38 3949.17,1667.48 SW17.4
  Bottom Layer w20: SW17.3 3949.17,1052.52 4391.56,1052.52 SW18.3 4514.39,1052.52 4956.78,1052.52 SW19.3 5079.62,1052.52 5522.01,1052.52 SW20.3
INPUT.TOG: S1.2 U1.10 | length 2999.1
  Top Layer w20: U1.10 3849.7,5842.5 3755,5937.2 3755,6817.5 3830,6892.5 4907.59,6892.5 S1.2
LED1: DS4.4 DS5.1 | length 415.2
  Bottom Layer w20: DS4.4 DS5.1
LED2: DS12.4 DS13.1 | length 415.2
  Bottom Layer w20: DS13.1 DS12.4
MIDI.RX: R2.1 U1.16 U2.6 | length 3299.5
  Top Layer w20: U2.6 2551.52,6202.5 R2.1 2933.01,6237.02 2933.01,6598.63 3128.37,6794 3196.63,6794 3577.5,6413.12 3577.5,5514.7 3849.7,5242.5 U1.16
MIDI.TX: U1.14 U3.4 U3.5 | length 3046.7
  Bottom Layer w20: U3.5 U3.4 1529.53,4554.53 2384.75,4554.53 2529.63,4409.65 2912.15,4409.65 3382.5,4880 3382.5,4975.3 3849.7,5442.5 U1.14
NetD1_1: D1.1 R1.2 U2.2 | length 711.2
  Top Layer w20: D1.1 1997.38,6337.62 2000,6335 ; R1.2@1893.48,6747.5 1893.48,6441.52 2000,6335 ; U2.2 2000,6335
NetD1_2: D1.2 J1.1 U2.3 | length 1175
  Top Layer w20: D1.2 1957.62,6202.5 U2.3
  Bottom Layer w20: J1.1 1700,6535 U2.3
NetDS1_1: DS1.1 U3.3 | length 1273.1
  Top Layer w20: DS1.1 1450.04,3356.83 1432.83,3374.04 1432.83,3971.69 1529.53,4068.38 1529.53,4224.57 1580,4275.04 U3.3
NetDS1_4: DS1.4 DS2.1 | length 415.2
  Bottom Layer w20: DS1.4 DS2.1
NetDS2_4: DS2.4 DS3.1 | length 415.2
  Bottom Layer w20: DS2.4 DS3.1
NetDS3_4: DS3.4 DS4.1 | length 415.2
  Bottom Layer w20: DS3.4 DS4.1
NetDS5_4: DS5.4 DS6.1 | length 415.2
  Bottom Layer w20: DS5.4 DS6.1
NetDS6_4: DS6.4 DS7.1 | length 415.2
  Bottom Layer w20: DS6.4 DS7.1
NetDS7_4: DS7.4 DS8.1 | length 415.2
  Bottom Layer w20: DS7.4 DS8.1
NetDS8_4: DS8.4 DS9.1 | length 1429.9
  Top Layer w20: DS8.4 5556.61,3046.11 5522.01,3011.5 5522.01,2468.5 5585.59,2404.91 5585.59,2179.09 5563.39,2156.89 DS9.1
NetDS9_4: DS9.4 DS10.1 | length 415.2
  Bottom Layer w20: DS10.1 DS9.4
NetDS10_4: DS10.4 DS11.1 | length 415.2
  Bottom Layer w20: DS11.1 DS10.4
NetDS11_4: DS11.4 DS12.1 | length 415.2
  Bottom Layer w20: DS12.1 DS11.4
NetDS13_4: DS13.4 DS14.1 | length 415.2
  Bottom Layer w20: DS14.1 DS13.4
NetDS14_4: DS14.4 DS15.1 | length 415.2
  Bottom Layer w20: DS15.1 DS14.4
NetDS15_4: DS15.4 DS16.1 | length 415.2
  Bottom Layer w20: DS16.1 DS15.4
NetJ1_2: J1.2 R1.1 | length 461.7
  Top Layer w20: J1.2 1311.85,6443.23 1364.74,6443.23 1589.02,6667.5 R1.1
NetJ2_1: J2.1 R5.1 | length 835.3
  Top Layer w20: R5.1 1280,5747.55 1233.43,5794.13 1233.43,6059.41 J2.1
NetJ2_2: J2.2 R4.1 | length 704
  Top Layer w20: J2.2 1412.5,5859.31 R4.1
NetJ3_1: J3.1 R6.1
NetJ3_8: J3.8 R10.1
NetR3_2: R3.2 U2.7 | length 251.8
  Bottom Layer w20: U2.7 2339.51,6309.51 2379.14,6309.51 2400.62,6330.98 R3.2
NetR5_2: R5.2 U3.6 | length 517.6
  Top Layer w20: R5.2@1277.5,5021.52 1280,5019.02 U3.6
ROT_A: ENC1.A U1.8 | length 2390.4
  Top Layer w20: U1.8 3875.3,6042.5 4165,5752.8 v1(4165,5232.5)
  Bottom Layer w20: v1(4165,5232.5) 4165,5057.5 4525.71,4696.79 ENC1.A
ROT_B: ENC1.B U1.9 | length 2386.2
  Top Layer w20: U1.9 3875.3,5942.5 4080,5737.8 v1(4080,5315)
  Bottom Layer w20: v1(4080,5315) 4470.31,5315 4907.22,4878.09 5207.97,4878.09 5389.27,4696.79 ENC1.B
ROT_SW: ENC1.D U1.17 | length 3117.7
  Top Layer w20: U1.17 4286.12,5142.5 5018.98,4409.65 5409.94,4409.65 5442.99,4442.69 5442.99,4651.59 5122.48,4972.1 5122.48,5181 5320.16,5378.68 5379.48,5378.68 ENC1.D
SC_CS: SC1.7 U1.25 | length 2269.4
  Top Layer w20: v1(3057.5,5952.5) 3057.5,5334.7 3149.7,5242.5 U1.25
  Bottom Layer w20: SC1.7 1976.68,6090 2114.18,5952.5 v1(3057.5,5952.5)
SC_MISO: SC1.1 U1.33 | length 1785.4
  Top Layer w20: SC1.1 2340,5490 v1(2885,6035)
  Bottom Layer w20: v1(2885,6035) 2888.75,6038.75 3158.75,6038.75 U1.33
SC_MOSI: SC1.4 U1.32 | length 1619.7
  Bottom Layer w20: SC1.4 2997.2,5790 3149.7,5942.5 U1.32
SC_SCK: SC1.3 U1.31 | length 1619.7
  Bottom Layer w20: SC1.3 2997.2,5690 3149.7,5842.5 U1.31
SD.CS: J3.2 R7.1 SC1.10 U1.2 | length 1285.6
  Bottom Layer w20: U1.2 3936.79,6642.5 4789.29,5790 SC1.10
SD.MISO: J3.7 R9.1 SC1.12 U1.1 | length 1777.6
  Top Layer w20: v1(4577.5,6422.5) 4577.5,5794.7 4782.2,5590 SC1.12
  Bottom Layer w20: U1.1 4257.5,6742.5 v1(4577.5,6422.5)
SD.MOSI: J3.3 R8.1 SC1.11 U1.4 | length 1244.2
  Bottom Layer w20: U1.4 3875.3,6442.5 4627.8,5690 SC1.11
SD.SCK: J3.5 SC1.13 U1.3 | length 1544.2
  Top Layer w20: v1(4245,6205) 4245,5905 4660,5490 SC1.13
  Bottom Layer w20: U1.3 3875.3,6542.5 4207.06,6210.74 4239.26,6210.74 v1(4245,6205)
WS2812: U1.7 U3.1 U3.2 | length 3837.1
  Bottom Layer w20: U3.2 U3.1 1905.35,4379.65 3368.7,4379.65 3589.47,4600.41 3706.03,4600.41 3926.79,4821.17 3926.79,6091 3875.3,6142.5 U1.7
pads on no net: DS16.4 ENC1.1 ENC1.2 J1.MH1 J1.MH2 J3.9 J3.10 J3.11 J3.12 J3.13 J3.14 SC1.14 SC1.15 SC1.16 SC1.17 SC1.18 U1.26 U1.27 U1.28 U1.29 U1.30 U1.34 U1.37 U1.40 U2.1 U2.4 U3.8 U3.11

## Polygon pours and split planes (outlines as drawn)
GND on Bottom Layer "GND_L02_P001" (solid, pour order 1): 1000,7012.5 6022.5,7012.5 6022.5,1000 1000,1000
GND on Top Layer "GND_L01_P000" (solid, pour order 0): 6022.5,7012.5 6022.5,1000 6015,1000 1000,1000 1000,7012.5